# Altium PCB Game Joystick 510.PcbDoc (part 2 of 2)
Units mil, origin at the board's own origin, x right, y up, seen from the top; angles counter-clockwise.
Board outline 4889.97 x 4392.01 mil, 2 copper layers (Top Layer, Bottom Layer); 77 components, 82 nets, 383 pads, 99 vias.
Unrouted connection lines stored in the file: 79.
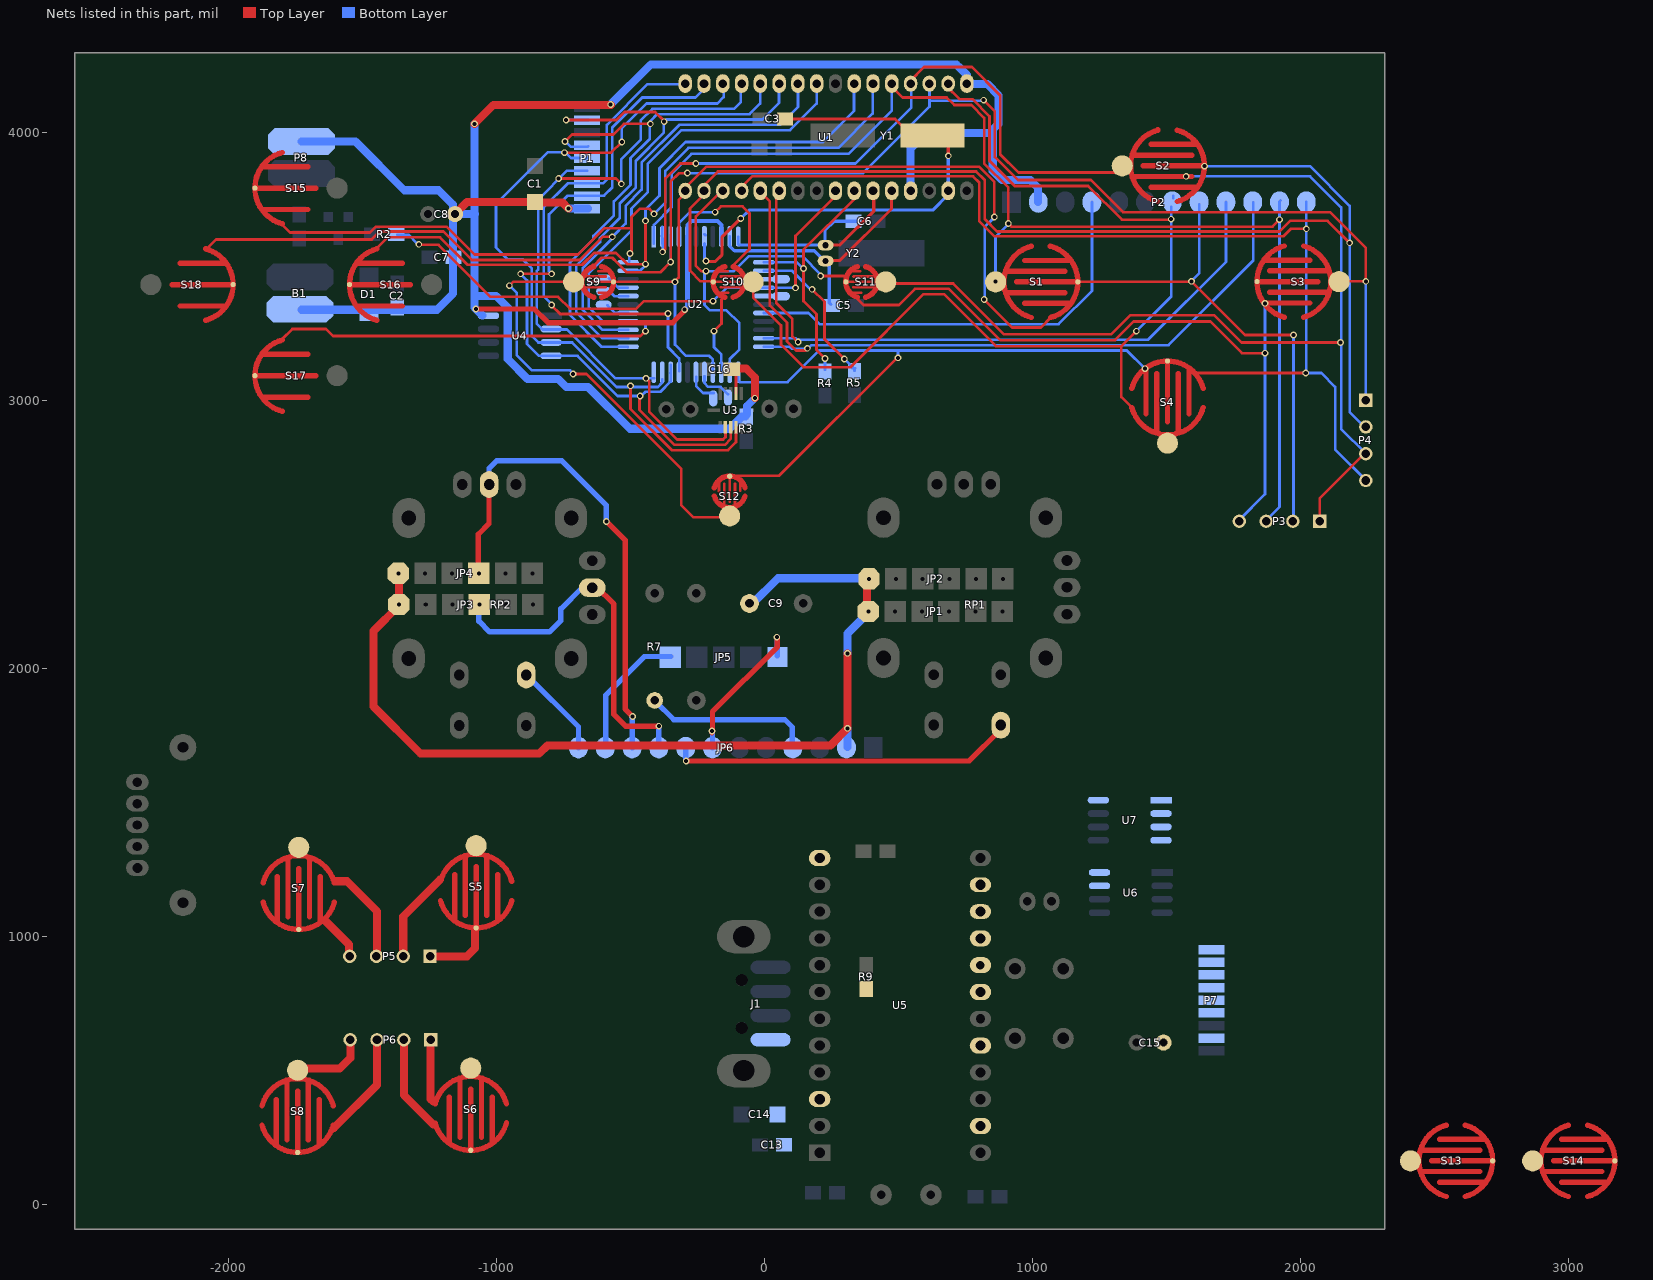
[diagram p2: the nets of this part, all layers, seen from the top]

## Via types
v1: diameter 25, hole 15, Top Layer to Bottom Layer, 90 vias
v2: diameter 30, hole 20, Top Layer to Bottom Layer, 9 vias

## Nets (pads, with @x,y where several pads share a name; then routed paths per layer and width w, separated by ;. In a path a pad name is that pad's centre, name@x,y a point inside that pad or via, vN(x,y) a via of type N, cw(c..) or ccw(c..) an arc to the next point about the centre after c; other vN are vias at no path point) (continued)
OSCO: C3.2 U1.2 U2.7 Y1.1 | length 1919
  Top Layer w10: v1(-219.16,3520.76) v1@-218.34,3519.94 ; v1(-89.66,3679.26) v1@-89.16,3678.76 ; C3.2@82.84,4050.76 486.84,4050.76 576.84,3960.76 Y1.1@640.84,3960.76 ; U1.2@678.84,3766.76 U1.2@678.84,3782.76 ; U1.2@680.84,3782.76 U1.2@680.84,3784.76
  Top Layer w12: v1@-217.16,3518.76 -185.16,3518.76 -159.16,3544.76 -159.16,3610.76 v1@-91.16,3678.76 ; v1@684.84,3910.76 Y1.1@684.84,3956.76
  Bottom Layer w10: v1@-225.18,3526.79 v1(-219.16,3520.76) ; U2.7@-225.16,3620.76 U2.7@-221.16,3616.76
  Bottom Layer w12: v1@-225.18,3526.79 U2.7@-225.18,3585.91 ; v1(-89.66,3679.26) -58.16,3710.76 626.85,3710.76 684.84,3768.76 v1@684.84,3910.76
  other v1: 684.9,3913.1
P74: JP5.5 JP6.11 P2.11 P3.3 P5.3 S1.2 S7.2 S14.2 U1.28 U2.1 | length 5488.6
  Top Layer w10: -1607.16,1204.01 -1601.16,1204.01 ; P5.3@-1453.16,924.01 P5.3@-1453.16,926.09 ; U1.28@470.84,4174.76 514.5,4131.1 678.9,4131.1 707.24,4102.76 770.83,4102.76 818.84,4054.76 818.84,3884.76 909.12,3794.49 v1(909.12,3660.48) 920.83,3648.76 1894.84,3648.76 v1(1920.84,3674.76)
  Top Layer w30: -1601.16,1206.01 -1559.16,1206.01 -1447.16,1094.01 -1447.16,934.01 P5.3@-1455.16,926.01
  Bottom Layer w10: U2.1@-414.16,3585.91 -414.16,3655.76 -347.16,3722.76 -347.16,3846.76 -273.16,3920.76 312.84,3920.76 474.09,4082.02 U1.28@474.09,4182.79 ; v1(860.84,3444.76) 860.84,3611.05 909.12,3659.33 v1(909.12,3660.48) ; P3.3@1869.24,2551.17 1920.84,2602.76 P2.11@1920.9,3740.76 ; P2.11@1920.84,3742.76 P2.11@1924.84,3746.76
  Bottom Layer w20: JP6.11@-593.16,1710.76 -593.16,1900.76 -449.16,2044.76 JP5.5@-351.16,2044.76
P75: P3.1 P4.3 P5.2 P6.4 S2.2 S5.2 S8.2 S11.2 U1.29 U2.2 | length 6980.8
  Top Layer w10: S8.2@-1741.16,506.01 S8.2@-1723.16,506.01 ; v1(-381.16,3554.76) -371.16,3564.76 -371.16,3828.76 -315.16,3884.76 v1(-257.16,3884.76) ; S11.2@464.84,3436.76 702.84,3436.76 892.5,3247.1 1292.9,3247.1 1364.56,3318.76 1676.84,3318.76 1778.84,3216.76 v1@2146.84,3216.76 ; U1.29@542.84,4192.76 594.84,4244.76 772.84,4244.76 878.84,4138.76 878.84,3918.76 946.84,3850.76 1310.84,3850.76 S2.2@1330.84,3870.76 ; P3.1@2070.84,2556.76 2070.84,2634.76 P4.3@2236.84,2800.76
  Top Layer w20: 1467.11,4008.93 1467.11,4011.03
  Top Layer w30: S8.2@-1738,507.24 -1586,507.24 -1546,547.24 P6.4@-1546,613.24 ; P5.2@-1349.1,926.09 -1349.1,1074.06 -1211.16,1212.01
  Bottom Layer w10: U2.2@-385.16,3614.11 U2.2@-382.61,3616.66 ; U2.2@-382.66,3585.91 U2.2@-382.66,3647.26 ; v1@-381.16,3556.76 U2.2@-381.16,3604.76 ; v1(-257.16,3884.76) 338.84,3884.76 546.84,4092.76 U1.29@546.84,4178.76 ; v1(1572.84,3836.76) 2034.84,3836.76 2150.84,3720.76 2150.84,2893.57 P4.3@2242.9,2801.51
  other v1: 2148.84,3216.76
P76: P4.1 P6.1 S3.2 S6.2 S9.2 S12.2 U1.30 U2.3 | length 6434.1
  Top Layer w10: P6.1@-1247.1,614.09 P6.1@-1247.16,620.01 ; -1239.16,382.01 -1235.16,378.01 ; v1(-953.16,3428.76) -939.16,3442.76 -717.16,3442.76 S9.2@-713.16,3446.76 ; v1(-715.16,3098.76) -665.15,3098.76 -311.16,2744.76 -311.16,2608.76 -267.15,2564.76 S12.2@-131.16,2564.76 ; -641.16,3500.76 -609.16,3532.76 -569.16,3532.76 -549,3512.6 -515.16,3478.76 -389.17,3478.76 v1(-351.16,3516.76) ; v1@-351.16,3518.76 -351.16,3816.76 -319.16,3848.76 v1(-289.16,3848.76) ; S12.2@-133.16,2566.76 S12.2@-131.16,2566.76 ; U1.30@612.84,4186.76 U1.30@612.84,4200.76 ; v1(816.84,4120.76) 858.84,4078.76 858.84,3908.76 944.84,3822.76 1216.84,3822.76 1336.84,3702.76 2108.84,3702.76 2242.84,3568.76 v1(2242.84,3444.76) S3.2@2143.39,3444.76
  Top Layer w20: -641.16,3498.76 -641.16,3500.76
  Top Layer w30: P6.1@-1247.16,616.01 -1247.16,394.01 -1237.16,384.01
  Bottom Layer w10: v1(-953.16,3428.76) -925.16,3400.76 -925.16,3168.76 -869.15,3112.76 -727.16,3112.76 v1@-715.16,3100.76 ; v1@-724.61,3098.76 v1(-715.16,3098.76) ; v1@-351.11,3522.81 U2.3@-351.11,3616.66 ; v1(-289.16,3848.76) 366.84,3848.76 614.84,4096.76 U1.30@614.84,4180.76 ; 614.84,4118.76 v1@814.84,4118.76 ; P4.1@2242.84,3004.76 v1(2242.84,3444.76)
P77: JP5.1 JP6.7 P2.7 S4.2 S10.2 S13.2 U1.31 U2.4 | length 4974.1
  Top Layer w10: v1(-185.16,3702.76) -163.16,3724.76 -83.16,3724.76 -57.16,3698.76 -57.16,3564.76 -113.16,3508.76 -113.16,3504.76 ; -121.16,3500.76 -113.16,3500.76 -113.16,3502.76 -112.16,3503.76 ; S10.2@-43.16,3442.76 -43.16,3384.76 60.84,3280.76 60.84,3208.76 144.85,3124.76 320.84,3124.76 592.84,3396.76 668.84,3396.76 862.49,3203.1 1331.18,3203.1 v1(1386.84,3258.76) v1@1386.84,3257.05 ; U1.31@678.84,4172.76 726.84,4124.76 774.83,4124.76 838.84,4060.76 838.84,3894.76 932.84,3800.76 1206.84,3800.76 1332.84,3674.76 v1@1516.84,3674.76 ; U1.31@682.84,4172.76 U1.31@682.84,4180.76 ; 1330.84,3202.76 1330.84,3012.76 1369.89,2973.72
  Top Layer w20: v1(-197.16,1766.76) -195.16,1768.76 -195.16,1838.76 46.84,2080.76 v1@46.84,2116.76 ; v1@-197.05,1760.76 v1@-197.05,1766.88
  Bottom Layer w10: U2.4@-319.67,3582.76 -319.67,3662.25 -279.16,3702.76 v1(-185.16,3702.76) ; v1@-197.05,1760.76 v1@-195.1,1762.71 ; v1(44.84,2116.76) v1@46.84,2114.76 ; v1(1386.84,3258.76) 1516.84,3388.76 P2.7@1516.84,3722.76 ; P2.7@1524.84,3754.76 P2.7@1524.84,3764.76
  Bottom Layer w20: JP6.7@-195.1,1704.76 v1@-195.1,1762.71 ; JP5.1@46.84,2046.76 v1@46.84,2114.76
  other v1: 1516.84,3676.76
P81_LED: R4.1 U1.7 U2.12 | length 992.6
  Top Layer w10: v1@224.84,3152.76 v1(224.84,3156.76) 192.84,3188.76 192.84,3322.76 144.84,3370.76 144.84,3562.76 332.84,3750.76 U1.7@332.84,3780.76
  Bottom Layer w10: U2.12@-4.01,3515.76 119.84,3515.76 140.84,3494.76 v1@144.84,3494.76 ; R4.1@224.84,3114.76 v1@224.84,3152.76 ; U1.7@330.84,3750.76 U1.7@330.84,3778.76 ; U1.7@332.84,3752.76 U1.7@332.84,3782.76
  other v1: 144.84,3492.76
P82_LED: R5.1 U2.13 | length 588.3
  Top Layer w10: v1(176.84,3414.76) 222.84,3368.76 222.84,3228.76 v1(296.84,3154.76)
  Bottom Layer w10: U2.13@-4.01,3484.27 101.34,3484.27 168.85,3416.76 v1@176.84,3416.76 ; v1(296.84,3154.76) 334.84,3116.76 R5.1@334.84,3110.76 ; R5.1@326.84,3120.76 R5.1@336.84,3120.76
P84_MOTOR: R2.1 U1.8 U2.15 | length 2057.3
  Top Layer w10: v1@-1289.16,3580.76 -1217.16,3580.76 -1023.16,3386.76 -771.17,3386.76 -727.17,3342.76 -479.15,3342.76 -451.16,3370.76 v1(-193.16,3370.76) ; v1@114.84,3422.76 114.84,3614.76 U1.8@274.84,3774.76
  Bottom Layer w10: R2.1@-1371.16,3618.76 -1329.17,3618.76 v1@-1295.16,3584.76 ; v1(-193.16,3370.76) -143.15,3420.76 v1@116.84,3420.76 ; U1.8@263.86,3780.76 U1.8@263.86,3782.79 ; U1.8@266.84,3770.76 U1.8@266.84,3780.76
  other v1: 114.84,3420.76 -1291.16,3582.76
P94: JP6.12 P2.12 P4.4 P6.3 RP2.8 S4.1 S8.1 S12.1 S14.1 U1.13 U2.23 | length 7111.8
  Top Layer w10: S12.1@-130.9,2719.32 53.12,2719.32 v1@494.55,3160.76 ; U1.13@-86.54,3782.79 -86.54,3797.39 -47.16,3836.76 776.84,3836.76 800.9,3812.71 800.9,3668.71 856.84,3612.76 1934.84,3612.76 1962.84,3640.76 v1(2020.84,3640.76) ; 1604.53,3102.76 v1(2018.84,3102.76)
  Top Layer w30: -1607.16,286.01 -1447.1,446.06 P6.3@-1447.1,614.09
  Bottom Layer w10: U2.23@-99.12,3110.36 -99.12,3074.73 -93.16,3068.76 84.85,3068.76 202.85,3186.76 1350.84,3186.76 v1(1418.84,3118.76) ; U1.13@-87.16,3780.76 U1.13@-85.16,3780.76 ; v1(496.9,3159.1) 496.9,3185.11 ; v1(2018.84,3102.76) 2076.84,3102.76 2128.84,3050.76 2128.84,2816.76 P4.4@2240.84,2704.76 ; 2020.84,3622.76 2020.84,3694.71 2020.9,3694.76 P2.12@2020.9,3740.76 ; v1@2020.9,3104.82 2020.9,3622.76
  Bottom Layer w20: RP2.8@-885.16,1972.76 -695.1,1782.71 JP6.12@-695.1,1704.76
P95: P3.4 P5.4 S3.1 S7.1 S11.1 U1.14 U2.24 | length 4316.3
  Top Layer w10: -1651.16,1056.01 -1646.16,1051.01 ; v1(-219.16,3482.76) -237.16,3482.76 -257.16,3502.76 -257.16,3686.76 -163.16,3780.76 U1.14@-157.16,3780.76 ; U1.14@-157.16,3770.76 U1.14@-157.16,3778.76 ; U1.14@-155.16,3766.76 U1.14@-155.16,3784.76 ; v1@212.84,3464.76 300.84,3464.76 320.84,3484.76 ; 346.84,3382.76 346.84,3378.76 368.84,3356.76 500.85,3356.76 560.84,3416.76 686.84,3416.76 878.49,3225.1 1306.9,3225.1 1376.56,3294.76 1662.84,3294.76 1780.84,3176.76 v1(1866.84,3176.76)
  Top Layer w20: v1(1866.84,3362.76) 1867.94,3363.86 1948.84,3363.86
  Top Layer w30: -1639.16,1058.01 -1551.16,970.01 P5.4@-1551.16,924.01
  Bottom Layer w10: U1.14@-155.16,3762.76 U1.14@-155.16,3774.76 ; U2.24@-130.61,3110.36 -130.61,3155.3 -95.1,3190.81 -95.1,3288.7 -143.16,3336.76 -205.16,3336.76 -225.16,3356.76 -225.16,3476.76 v1(-219.16,3482.76) -115.16,3482.76 -59.17,3538.76 140.85,3538.76 208.84,3470.76 v1@208.84,3462.76 ; P3.4@1768.84,2552.76 1866.84,2650.76 v1(1866.84,3362.76)
  other v1: 208.84,3464.76
P96: P4.2 P6.2 S2.1 S6.1 S10.1 U1.15 U2.25 | length 5213.9
  Top Layer w10: -1232.16,303.01 -1229.16,300.01 ; U1.15@-226.69,3782.79 U1.15@-226.69,3784.76 ; U1.15@-226.69,3803.23 -175.16,3854.76 788.84,3854.76 820.9,3822.71 820.9,3677.1 867.24,3630.76 1920.84,3630.76 1960.84,3670.76 2100.84,3670.76 v1(2182.84,3588.76) ; U1.15@-225.16,3784.76 -225.16,3770.76 -279.16,3716.76 -279.16,3484.76 -239.16,3444.76 S10.1@-193.16,3444.76 ; v1@-189.16,3260.76 -187.44,3260.76 -161.16,3287.05 -161.16,3376.76 -149.16,3388.76
  Top Layer w30: P6.2@-1347.16,616.01 -1347.16,408.01 -1237.16,298.01
  Bottom Layer w10: v1@-189.16,3260.76 -189.16,3198.76 -162.11,3171.72 U2.25@-162.11,3110.36 ; v1(1640.84,3874.76) 2034.84,3874.76 2182.84,3726.76 2182.84,2956.76 P4.2@2238.84,2900.76
  other v1: -189.1,3259.1
P97: JP6.8 P2.8 P3.2 P5.1 RP1.10 S1.1 S5.1 S9.1 S13.1 U1.16 U2.26 | length 6425.8
  Top Layer w10: S9.1@-563.02,3442.79 -375.16,3442.79 ; -375.13,3442.76 v1(-335.16,3442.76) ; v1@-335.16,3440.76 -335.16,3444.76 -321.16,3458.76 -321.16,3748.76 U1.16@-295.16,3774.76 ; U1.16@-299.16,3788.76 -299.16,3790.76 -217.16,3872.76 798.84,3872.76 856.9,3814.71 v1@856.9,3680.76 ; U1.16@-297.16,3772.76 U1.16@-295.16,3772.76 ; U1.16@-297.16,3780.76 U1.16@-295.16,3778.76 ; U1.16@-290.81,3781.88 -290.28,3785.39 U1.16@-289.16,3792.76 ; v1(818.84,3376.76) 922.84,3272.76 1030.84,3272.76 1068.84,3310.76 ; S1.1@1168.25,3442.79 1592.84,3442.79 1594.82,3442.79 1792.84,3244.76 v1(1972.84,3244.76)
  Top Layer w20: v1@-293.16,1656.76 -291.16,1654.76 762.85,1654.76 878.84,1770.76 RP1.10@878.84,1788.76
  Top Layer w30: P5.1@-1249.1,926.09 -1111.15,926.09 -1081.16,956.09 S5.1@-1081.16,1024.01
  Bottom Layer w10: v1@-335.16,3440.76 -335.16,3208.76 -293.16,3166.76 -207.16,3166.76 -193.61,3153.21 U2.26@-193.61,3110.36 ; v1@-295.1,1658.71 v1@-293.16,1656.76 ; v1(818.84,3376.76) 820.84,3378.76 820.84,3647.05 854.56,3680.76 v1@856.9,3680.76 ; v1@1592.84,3446.76 1620.84,3474.76 P2.8@1620.84,3732.76 ; P3.2@1972.84,2552.76 v1(1972.84,3244.76)
  Bottom Layer w20: v1@-295.1,1658.71 JP6.8@-295.1,1704.76
  other v1: -293.16,1654.76 1592.84,3444.76 856.9,3685.1
PB1_LEFT: S18.1 U1.23 U2.36 | length 3218.6
  Top Layer w10: -2083.02,3564.9 -2047.16,3600.76 -1467.16,3600.76 -1437.16,3630.76 -1199.16,3630.76 -1093.16,3524.76 -691.16,3524.76 -605.16,3610.76 v1(-569.16,3610.76)
  Bottom Layer w10: U2.36@-510.01,3263.8 -605.79,3263.8 -679.1,3337.1 -679.1,3495.1 -569.16,3605.05 v1(-569.16,3610.76) -519.16,3660.76 -519.16,3726.76 -459.16,3786.76 -459.16,3888.76 -319.16,4028.76 56.84,4028.76 123.7,4095.62 U1.23@123.7,4182.79
PB2_DOWN: S17.1 U1.24 U2.37 | length 3078.5
  Top Layer w10: -1801.16,3228.76 -1763.16,3266.76 -1637.16,3266.76 -1611.16,3240.76 -463.44,3240.76 -447.45,3256.76 v1@-441.16,3256.76
  Bottom Layer w10: v1@-445.16,3260.76 -445.16,3282.75 -457.7,3295.29 -603.29,3295.29 -657.1,3349.1 -657.1,3474.82 -497.16,3634.76 -497.16,3716.76 -437.16,3776.76 -437.16,3882.76 -311.16,4008.76 94.84,4008.76 193.78,4107.7 U1.24@193.78,4182.79
  other v1: -445.16,3258.76
PB4_RIGHT: S16.1 U1.26 U2.43 | length 2454.3
  Top Layer w10: -1443.16,3572.76 -1407.16,3608.76 -1211.16,3608.76 -1109.16,3506.76 -681.16,3506.76 -637.17,3550.76 -555.16,3550.76 -513.16,3508.76 v1(-445.16,3508.76) ; v1@-447.16,3508.76 -445.16,3510.76 v1@-445.16,3668.76
  Bottom Layer w10: U2.43@-510.01,3484.27 -465.65,3484.27 -447.16,3502.76 v1@-447.16,3508.76 ; v1(-445.16,3670.76) -445.16,3712.76 -393.16,3764.76 -393.16,3866.76 -295.16,3964.76 216.84,3964.76 332.84,4080.76 U1.26@332.84,4174.76
PB5_UP: S15.1 U1.27 U2.44 | length 2836.4
  Top Layer w10: -1805.16,3660.76 -1771.16,3626.76 -1473.16,3626.76 -1451.16,3648.76 -1187.16,3648.76 -1083.16,3544.76 -697.16,3544.76 -599.16,3642.76 -499.16,3642.76 -497.16,3644.76 ; v1@-505.16,3548.76 -497.16,3556.76 -497.16,3684.76 -466.82,3715.1 -429.5,3715.1 v1@-413.16,3698.76
  Bottom Layer w10: U2.44@-505.16,3518.76 v1@-505.16,3548.76 ; v1(-413.16,3696.76) -371.16,3738.76 -371.16,3856.76 -285.16,3942.76 274.84,3942.76 402.84,4070.76 U1.27@402.84,4178.76
  other v1: -503.16,3548.76
PKT_FLAG_P66: P7.8 U5.20
PKT_FLAG_PB0: P1.8 U1.22 U2.35 | length 2074.1
  Top Layer w10: v1(-741.16,4046.76) -553.16,4046.76 -523.16,4076.76 -409.16,4076.76 v1@-375.16,4042.76
  Bottom Layer w10: v1(-741.16,4046.76) P1.8@-659.16,4046.76 ; U2.35@-510.01,3232.3 -606.3,3232.3 -703.1,3329.1 -703.1,3503.1 -615.16,3591.05 -615.16,3606.76 -541.16,3680.76 -541.16,3734.76 -481.16,3794.76 -481.16,3894.76 -377.16,3998.76 v1@-377.16,4040.76 ; v1@-367.16,4048.76 -9.16,4048.76 52.84,4110.76 U1.22@52.84,4184.76
  other v1: -375.16,4040.76
REFERENCE: JP6.4 P2.4 R7.1 U2.18 | length 2250.2
  Bottom Layer w10: U2.18@-4.01,3326.79 162.82,3326.79 204.84,3284.76 1096.84,3284.76 1220.9,3408.82 P2.4@1220.9,3740.76
  Bottom Layer w20: R7.1@-409.16,1878.76 -339.16,1808.76 74.84,1808.76 102.84,1780.76 JP6.4@102.84,1708.76
RESET_N_P61: P7.3 U5.15
RF_RESET_PA3: P1.3 U1.17 U2.30 | length 1894.3
  Top Layer w10: v1@-795.16,3354.76 -763.15,3322.76 v1@-363.16,3322.76
  Bottom Layer w10: v1@-793.16,3358.76 -825.16,3390.76 -825.16,3720.76 -735.16,3810.76 P1.3@-663.16,3810.76 ; P1.3@-663.16,3810.46 -603.46,3810.46 -589.16,3824.76 -589.16,4028.76 -437.16,4180.76 U1.17@-295.16,4180.76 ; v1(-361.16,3324.76) -361.16,3198.76 -319.59,3157.2 U2.30@-319.59,3110.36 ; U1.17@-296.77,4180.76 U1.17@-296.77,4182.79
  other v1: -795.16,3356.76
RX_P93/AD0: JP4.4 JP6.10 P2.10 RP2.5 U1.12 U2.22 | length 4775.5
  Top Layer w10: JP4.4@-1065.16,2352.76 JP4.4@-1065.16,2354.76 ; RP2.5@-1031.16,2684.76 RP2.5@-1031.16,2690.76 ; U1.12@-18.82,3780.43 18.84,3742.76 18.84,3354.76 82.84,3290.76 82.84,3220.76 116.84,3186.76 150.84,3186.76 v1(158.84,3194.76)
  Top Layer w20: JP4.4@-1069.16,2354.76 -1069.16,2500.76 -1029.16,2540.76 RP2.5@-1029.16,2684.76 ; v1(-591.16,2548.76) -521.16,2478.76 -521.16,1848.76 v1(-493.16,1820.76)
  Bottom Layer w10: JP6.10@-495.1,1704.76 JP6.10@-495.1,1704.76 ; v1@-495.1,1818.82 v1(-493.16,1820.76) ; U1.12@-17.16,3756.76 U1.12@-17.16,3778.76 ; U2.22@-3.16,3200.76 92.84,3200.76 100.84,3192.76 160.84,3192.76 174.84,3206.76 1506.84,3206.76 1822.84,3522.76 P2.10@1822.84,3738.81
  Bottom Layer w20: RP2.5@-1029.16,2692.76 -1029.16,2746.76 -1001.16,2774.76 -757.16,2774.76 -591.16,2608.76 v1(-591.16,2548.76) ; JP6.10@-495.1,1704.76 v1@-495.16,1822.76
RY_P92/AD1: JP3.4 JP6.9 P2.9 RP2.2 U1.11 U2.21 | length 4029.3
  Top Layer w10: U1.11@56.84,3776.76 42.9,3762.82 42.9,3364.71 102.84,3304.76 102.84,3238.76 v1@122.84,3218.76 ; v1@123.84,3219.76 v1(124.84,3218.76)
  Top Layer w20: RP2.2@-629.16,2306.76 -563.16,2240.76 -563.16,1828.76 -519.16,1784.76 v1(-395.16,1784.76)
  Bottom Layer w10: JP6.9@-395.16,1718.76 JP6.9@-391.16,1714.76 ; U2.21@-3.16,3232.76 114.84,3232.76 120.84,3226.76 1430.84,3226.76 1720.9,3516.82 P2.9@1720.9,3740.76
  Bottom Layer w20: JP3.4@-1067.16,2238.76 -1067.16,2176.76 -1027.16,2136.76 -803.16,2136.76 -761.16,2178.76 -761.16,2222.76 -681.16,2302.76 RP2.2@-643.16,2302.76 ; JP6.9@-395.16,1718.76 v1(-395.16,1784.76)
SPI_CLK_P62: P7.4 U5.16 U7.2
SPI_CLK_PA6: P1.4 U1.20 U2.33 U3.7 U4.2 | length 2685.7
  Top Layer w10: v1(-769.16,3828.76) -555.16,3828.76 v1(-535.16,3808.76) ; v1(-443.16,3082.76) -431.16,3070.76 -431.16,2958.76 -327.16,2854.76 -155.16,2854.76 -146.79,2863.13 U3.7@-146.79,2900.52
  Bottom Layer w10: P1.4@-663.16,3857.71 -738.22,3857.71 -845.16,3750.76 -845.16,3488.76 -851.16,3482.76 -851.16,3286.76 -829.16,3264.76 -738.76,3264.76 -556.76,3082.76 U2.33@-413.16,3082.76 ; v1(-535.16,3808.76) -535.16,3900.76 -463.16,3972.76 -463.16,4044.76 -419.16,4088.76 -115.16,4088.76 -89.16,4114.76 U1.20@-89.16,4176.76
SPI_CS_P56: U5.12 U7.1
SPI_MISO_P60: P7.2 U5.14 U7.4
SPI_MISO_PA4: P1.2 U1.18 U2.31 U3.8 U4.4 | length 2773.5
  Top Layer w10: v1(-911.16,3472.76) v1(-795.16,3472.76) ; v1@-467.16,3016.76 -467.16,2964.76 -337.16,2834.76 -149.16,2834.76 -127.1,2856.82 U3.8@-127.1,2900.52 ; U1.18@-227.16,4152.76 U1.18@-227.16,4188.76
  Bottom Layer w10: v1(-911.16,3472.76) -887.16,3448.76 -887.16,3210.76 -843.16,3166.76 -698.76,3166.76 -548.76,3016.76 -461.15,3016.76 -445.16,3032.76 -388.62,3032.76 -351.09,3070.29 -351.09,3104.84 U2.31@-353.16,3102.76 ; v1(-795.16,3472.76) -805.16,3482.76 -805.16,3694.76 -735.16,3764.76 -599.16,3764.76 -569.16,3794.76 -569.16,4018.76 -457.16,4130.76 -259.16,4130.76 -229.16,4160.76 U1.18@-229.16,4186.76 ; U2.31@-351.09,3110.36 U2.31@-351.09,3132.76
  other v1: -465.16,3016.76
SPI_MOSI_P63: P7.5 U5.17 U7.3
SPI_MOSI_PA5: P1.5 U1.19 U2.32 U3.9 U4.3 | length 2956.5
  Top Layer w10: v1(-747.16,3924.76) -573.22,3924.76 v1(-533.16,3964.83) ; v1(-501.16,3054.76) -501.16,2968.76 -347.16,2814.76 -137.16,2814.76 -107.42,2844.5 U3.9@-107.42,2900.52
  Bottom Layer w10: P1.5@-663.16,3904.95 -723.34,3904.95 -745.16,3926.76 -809.16,3926.76 -1003.16,3732.76 -1003.16,3570.76 -959.16,3526.76 -903.16,3526.76 -869.16,3492.76 -869.16,3240.76 -845.16,3216.76 -718.76,3216.76 -552.76,3050.76 -399.16,3050.76 -382.64,3067.28 U2.32@-382.64,3079.61 ; v1(-533.16,3964.83) -533.16,4016.76 -441.16,4108.76 -177.16,4108.76 -153.16,4132.76 U1.19@-153.16,4172.76
SPI_SS_P64: P7.6 U5.18
SPI_SS_PA7: P1.6 U1.21 U2.34 | length 2057.1
  Top Layer w10: v1@-743.16,3968.76 -719.16,3992.76 -565.16,3992.76 -525.16,4032.76 v1(-427.16,4032.76)
  Bottom Layer w10: v1@-743.16,3966.76 -723.16,3946.76 -661.16,3946.76 P1.6@-659.16,3948.76 ; U2.34@-511.16,3198.76 -513.16,3200.76 -608.76,3200.76 -727.1,3319.1 -727.1,3515.16 -639.16,3603.1 -639.16,3614.76 -563.16,3690.76 -563.16,3742.76 -501.16,3804.76 -501.16,3904.76 -429.16,3976.76 v1@-429.16,4030.76 ; v1(-427.16,4032.76) -427.16,4042.76 -401.16,4068.76 -57.16,4068.76 -17.16,4108.76 U1.21@-17.16,4182.09
  other v1: -745.16,3966.76
TEST_P71: pad.1 U2.40 | length 80.3
  Bottom Layer w10: pad.1@-581.1,3409.1 -561.1,3389.1 U2.40@-509.1,3389.1
TEST_P72: pad.0 U2.41 | length 84.1
  Bottom Layer w10: pad.0@-581.1,3455.1 -547.1,3421.1 U2.41@-511.1,3421.1
TEST_P83: pad.5 U2.14
TEST_P85: pad.6 U2.16
TEST_PA0: pad.3 U2.27 | length 131.4
  Bottom Layer w10: U2.27@-225.1,3091.1 -225.1,3065.1 -211.1,3051.1 -165.1,3051.1 pad.3@-137.1,3023.1
TEST_PA1: pad.4 U2.28 | length 111.5
  Bottom Layer w10: U2.28@-255.1,3089.1 -255.1,3053.1 -230,3028 pad.4@-190,3028
TEST_PB3: pad.2 U2.38 | length 88.8
  Bottom Layer w10: pad.2@-587.1,3355.1 -558.79,3326.79 U2.38@-510.01,3326.79
V3.3: C15.1 P7.1 R9.1 U5.3 | length 4.5
  Top Layer w25: C15.1@1488.84,604.84 C15.1@1492,608
VDD: B1.1 C1.1 C2.2 C7.2 C8.1 C9.2 C13.2 C14.1 C16.2 D1.1 J1.1 JP1.1 JP2.1 JP3.1 JP4.1 JP6.2 P1.1 P2.2 P8.1 R3.1 U1.4 U1.32 U2.5 U2.9 U3.2 U4.8 U5.23 U6.7 U6.8 U7.8 | length 12687.5
  Top Layer w10: JP4.1@-1365.16,2362.76 JP4.1@-1363.16,2364.76 ; U3.2@-107.42,3026.51 C16.2@-107.42,3099.02 ; JP2.1@380.84,2318.76 JP2.1@386.84,2324.76
  Top Layer w20: v1(-1078.15,3341.75) -860.16,3341.75 -809.16,3290.76 -343.45,3290.76 -299.1,3335.1 v1(-299.1,3339.1)
  Top Layer w30: JP3.1@-1366,2234 -1460,2140 -1460,1858 -1284,1682 -842,1682 -811.24,1712.76 244.84,1712.76 v1(308.84,1776.76) v1(308.84,2056.76) ; JP3.1@-1365.16,2246.76 JP4.1@-1365.16,2362.76 ; C8.1@-1155.16,3696.76 -1111.16,3740.76 C1.1@-859.16,3740.76 ; v1(-1083.16,4032.76) -1013.16,4102.76 v1@-573.16,4102.76 ; C1.1@-857.16,3738.76 -755.16,3738.76 v1(-733.16,3716.76) ; C16.2@-125.16,3118.76 -69.16,3118.76 -37.16,3086.76 v1(-37.16,3008.76) ; JP1.1@380.84,2212.76 JP2.1@380.84,2318.76
  Bottom Layer w15: U2.5@-288.17,3585.91 -288.17,3655.75 -273.66,3670.26 -176.66,3670.26 -162.19,3655.8 U2.9@-162.19,3585.91 ; R3.1@-69.1,2939.51 R3.1@-69.16,2948.76 ; U1.4@540.84,3788.76 U1.4@540.84,3812.76
  Bottom Layer w20: v1(-299.1,3339.1) -288.17,3350.03 U2.5@-288.17,3612.76
  Bottom Layer w30: B1.1@-1729.16,3338.76 -1223.16,3338.76 -1163.16,3398.76 -1163.16,3730.76 -1217.16,3784.76 -1345.16,3784.76 -1527.16,3966.76 P8.1@-1729.16,3966.76 ; C2.2@-1367.16,3338.76 C2.2@-1359.16,3346.76 ; C8.1@-1159.1,3695.51 -1081.91,3695.51 -1083.16,3694.26 -1083.16,3346.76 U4.8@-1053.16,3316.76 ; -1083.16,3700.76 v1(-1083.16,4032.76) ; -1079.16,3390.76 -1003.16,3390.76 -959.16,3346.76 -959.16,3154.76 -885.16,3080.76 -770.75,3080.76 -740.75,3050.76 -659.16,3050.76 -503.16,2894.76 -131.17,2894.76 -85.17,2940.76 R3.1@-71.16,2940.76 ; v1@-727.16,3716.76 P1.1@-659.16,3716.76 ; v1(-575.16,4104.76) -425.16,4254.76 714.84,4254.76 729.09,4240.51 754.84,4214.76 754.84,4180.76 830.84,4180.76 872.84,4138.76 872.84,4032.76 838.84,3998.76 602.84,3998.76 544.17,3940.09 U1.4@544.17,3782.79 ; R3.1@-67.16,2948.76 -67.16,2978.76 v1(-37.16,3008.76) ; C9.2@-45.16,2242.76 48.84,2336.76 JP2.1@392.84,2336.76 ; JP6.2@308.84,1706.76 v1(308.84,1776.76) ; v1(308.84,2056.76) 308.84,2130.76 JP1.1@388.84,2210.76 ; 850.84,4010.76 850.84,3856.76 884.84,3822.76 990.84,3822.76 1018.84,3794.76 P2.2@1018.84,3740.76
XIN: C5.2 U1.5 U2.10 Y2.1 | length 979.6
  Top Layer w12: Y2.1@224.84,3522.76 280.84,3522.76 472.84,3714.76 U1.5@472.84,3782.76
  Bottom Layer w10: U2.10@-130.69,3576.3 U2.10@-130.69,3611.91
  Bottom Layer w12: U2.10@-130.69,3576.3 -113.16,3558.76 184.84,3558.76 240.84,3502.76 240.84,3364.76 C5.2@246.84,3358.76
XOUT: C6.2 U1.6 U2.11 Y2.2 | length 842.9
  Top Layer w12: Y2.2@230.84,3580.76 280.84,3580.76 406.84,3706.76 406.84,3774.76 U1.6@400.84,3780.76
  Bottom Layer w10: U2.11@-99.16,3610.76 -99.16,3584.76 U2.11@-95.16,3580.76 ; Y2.2@218.84,3580.76 Y2.2@224.84,3586.76
  Bottom Layer w12: U2.11@-95.16,3580.76 Y2.2@218.84,3580.76 ; Y2.2@224.84,3586.76 224.84,3634.76 258.84,3668.76 C6.2@346.84,3668.76
pads on no net: J1. RP1.9 RP2.7 S19.1@933.9,879.76 U3.1 U3.4 U3.6 U3.11 U3.12 U4.7 U5.13 U5.21 U5.22 U7.7

## Keep-outs
Keep-Out Layer:
  circle w8: c2048.14,1498.82 r68.9
  circle w8: c2048.14,2.76 r68.9
  circle w8: c1122.94,60.81 r68.9
  circle w8: c827.67,1446.64 r68.9
  circle w8: c-19.68,1497.84 r68.9
  circle w8: c-19.68,1.76 r68.9
  circle w8: c1425.83,2250.8 r82.68
  circle w8: c-1708.03,2250.8 r82.68
  circle w8: c-141.1,2347.26 r49.21
  circle w8: c-2357.75,1692.41 r65.05
  circle w8: c-1681.51,78.27 r68.9
  circle w8: c-1681.51,621.57 r68.9
  circle w8: c-1681.51,1447.83 r68.9
  circle w8: c-1681.51,904.52 r68.9
  circle w8: c-928.06,3613.94 r45
  circle w8: c-731.21,3613.94 r45
  circle w8: c-2296.25,2934.91 r43.31
  circle w8: c2046.27,2934.91 r43.31
  circle w8: c-1245.29,3962.47 r74.8
  circle w8: c983.5,3962.47 r74.8
  circle w8: c1985.69,3986.71 r49.21
  circle w8: c-2239.61,3986.71 r49.21
  lines w8: -2571.91,3510.71 -2571.91,2532.16 -2521.91,2482.16 -1784.5,2482.16 -1784.5,2560.9 -1700.71,2560.9 ; -2571.86,3510.72 cw(c-1542.9,3307.77) -2309.05,4023.99 ; -2534.97,9.74 -2534.97,1749.03 -2406.55,1877.45 -2023.1,1877.45 ; -2534.91,9.81 -2493.1,-32 -2335.16,-32 -2335.16,6 ; -2335.16,4 cw(c-2290.16,4) -2245.16,4 -2245.16,-32 -2023.16,-32 -2023.16,677.73 -2023.16,1464.76 ; -2308.68,4023.24 -2259.21,4072.71 -1316,4072.71 -1253.01,4135.7 -603.1,4135.57 -603.1,4294.76 771.65,4294.76 854.9,4211.51 993.62,4072.79 1081.23,4072.79 ; -2023.1,1465.78 -2023.1,1876.76 ; -1957.16,790.35 -1957.16,1562 ; -1957.1,790.35 -1924.13,790.35 -1379.32,790.35 -1347.83,821.84 -826.56,821.84 -776,872.4 -776,1478.09 -828.42,1530.51 -1347.83,1530.51 -1379.32,1562 -1924.13,1562 -1957.1,1562 ; -1927.1,-35.91 -1382.3,-35.91 -1350.8,-4.41 -832.81,-4.41 -776,52.4 -776,650.09 -830.17,704.25 -1350.8,704.25 -1382.3,735.75 -1927.1,735.75 -1957.16,735.75 -1957.16,-36 -1923.25,-36 -1923.16,-35.91 ; -1700.71,2561.23 cw(c-1026.57,2344.9) -331.99,2482.1 70.13,2482.16 ; -1595.84,2415.9 cw(c-1023.7,2305.6) -451.63,2416.25 ; -1595.84,2416.16 -1834.02,2416.16 -1834.02,1845.29 -1617.48,1628.76 1335.28,1628.76 1551.81,1845.29 1551.81,2416.16 1313.64,2416.16 ; -1315.94,4072.71 -1252.94,4135.7 ; -452.1,2416.16 169.42,2416.16 ; -327.81,2482.16 65.89,2482.16 ; 70.13,2482.1 cw(c764.71,2344.9) 1438.85,2561.23 ; 169.42,2416.25 cw(c741.5,2305.6) 1313.64,2415.9 ; 1081.23,4072.71 1081.23,4072.79 ; 1438.85,2560.9 1522.65,2560.9 1522.65,2482.16 2260.05,2482.16 2310.05,2532.16 2310.05,3510.71 ; 1999.02,4072.71 2047.25,4024.49 cw(c1281.1,3308.26) 2310.06,3511.22 ; 1999.29,4072.79 1081.23,4072.79 ; -205.16,-89.24 2166.89,-89.24 2166.9,1588.76 -205.16,1588.76 -205.16,-89.24 ; 1658.9,1004.76 1658.9,1126.76 2054.9,1126.76 2054.9,1004.76 1658.9,1004.76

## Other copper
Bottom Layer:
  rectangle net GND: -2237.1,1072.76 -2059.1,1358.76
  rectangle net GND: -2233.1,1470.76 -2057.1,1788.76
  rectangle net 5: -2517.1,1546.76 -2267.05,1606.76
  rectangle net 1: -2519.1,1076.76 -2267.1,1288.76

## Silkscreen, mask and mechanical layers (free items; w line width, h text height)
Top Overlay:
  circle w10: c982.9,3965.51 r137.8
  circle w10: c-1246.1,3962.51 r137.79
  text "Game Joystick P510" at -2559.1,2684.76 h60
  text "2009.08.18  V1.0" at -2523.16,2526.76 h60
  text "L1" at -1347.1,982.76 h60
  text "L2" at -1547.1,976.76 h60
  text "Game Joystick P510" at -2181.1,934.76 h60 r270
  text "Game Joystick P510" at 974,486 h60
  text "R2" at -1557.16,460.76 h60
  text "R1" at -1354.08,450.6 h60
  text "2009.08.18  V1.0" at 1060,354 h60
Bottom Overlay:
  circle w10: c1122.94,60.81 r88.58
  circle w10: c826.33,1446.64 r88.58
  circle w10: c2048.52,1497.82 r88.58
  circle w10: c2048.52,1.76 r88.58
  circle w10: c-20.58,2 r88.58
  circle w10: c-20.58,1496 r88.58
  lines w7.99: -156.1,-20.55 -156.1,22.76 119.49,22.76 ; -154.1,1478.45 -154.1,1521.76 121.49,1521.76 ; 687.9,1429.45 687.9,1472.76 963.49,1472.76 ; 984.9,40.45 984.9,83.76 1260.49,83.76
  lines w8: -156.1,-20.55 119.59,-20.55 119.49,-20.45 119.49,22.76 ; -154.1,1478.45 121.59,1478.45 121.49,1478.55 121.49,1521.76 ; 687.9,1429.45 963.59,1429.45 ; 963.49,1429.55 963.49,1472.76 ; 984.9,40.45 1260.59,40.45 ; 1260.49,40.55 1260.49,83.76
  text "VDD" at -1907.1,3961.51 h60
  text "GND" at -1909.1,3851.51 h60
  text "P72" at -659.1,3449.1 h35
  text "P83" at 190,3438 h35
  text "GND" at -1887.1,3406.76 h60
  text "P71" at -657.1,3387.1 h35
  text "P85" at 188,3344 h35
  text "PB3" at -655.1,3335.1 h35
  text "VDD" at -1889.1,3274.76 h60
  text "PA1" at -196,2954 h35 r90
  text "PA0" at -132,2954 h35 r90
  text "R1" at 2106.9,2903.51 h60 r270
  text "R2" at 2102.9,2703.51 h60 r270
  text "L1" at 2050.9,2637.51 h60
  text "L2" at 1854.9,2635.51 h60
  text "2009.08.18  V1.0" at 116.84,2134.76 h60
  text "Game Joystick P510" at 286.84,1920.76 h60
  text "P94" at -738.1,1797.76 h30 r180
  text "P74" at -639.1,1797.76 h30 r180
  text "RX" at -528.1,1797.76 h30 r180
  text "RY" at -431.1,1797.76 h30 r180
  text "P77" at -341.1,1797.76 h30 r180
  text "P97" at -241.1,1797.76 h30 r180
  text "LX" at -124.1,1797.76 h30 r180
  text "LY" at -25.1,1797.76 h30 r180
  text "Ref" at 61.9,1797.76 h30 r180
  text "Leak" at 152.9,1797.76 h30 r180
  text "VDD" at 258.9,1797.76 h30 r180
  text "GND" at 358.84,1796.76 h30 r180

## Text inside footprints (layer, text, board x,y; h text height)
U2: Bottom Overlay "1" at -475.16,3651.91 h45 r180
U3: Top Overlay "1" at -64.1,3050.51 h25 r180